# Altium PCB Motor_K.PcbDoc
Units mil, origin at the board's own origin, x right, y up, seen from the top; angles counter-clockwise.
Board outline 870 x 1190 mil, 2 copper layers (Top Layer, Bottom Layer); 15 components, 15 nets, 50 pads, 31 vias.
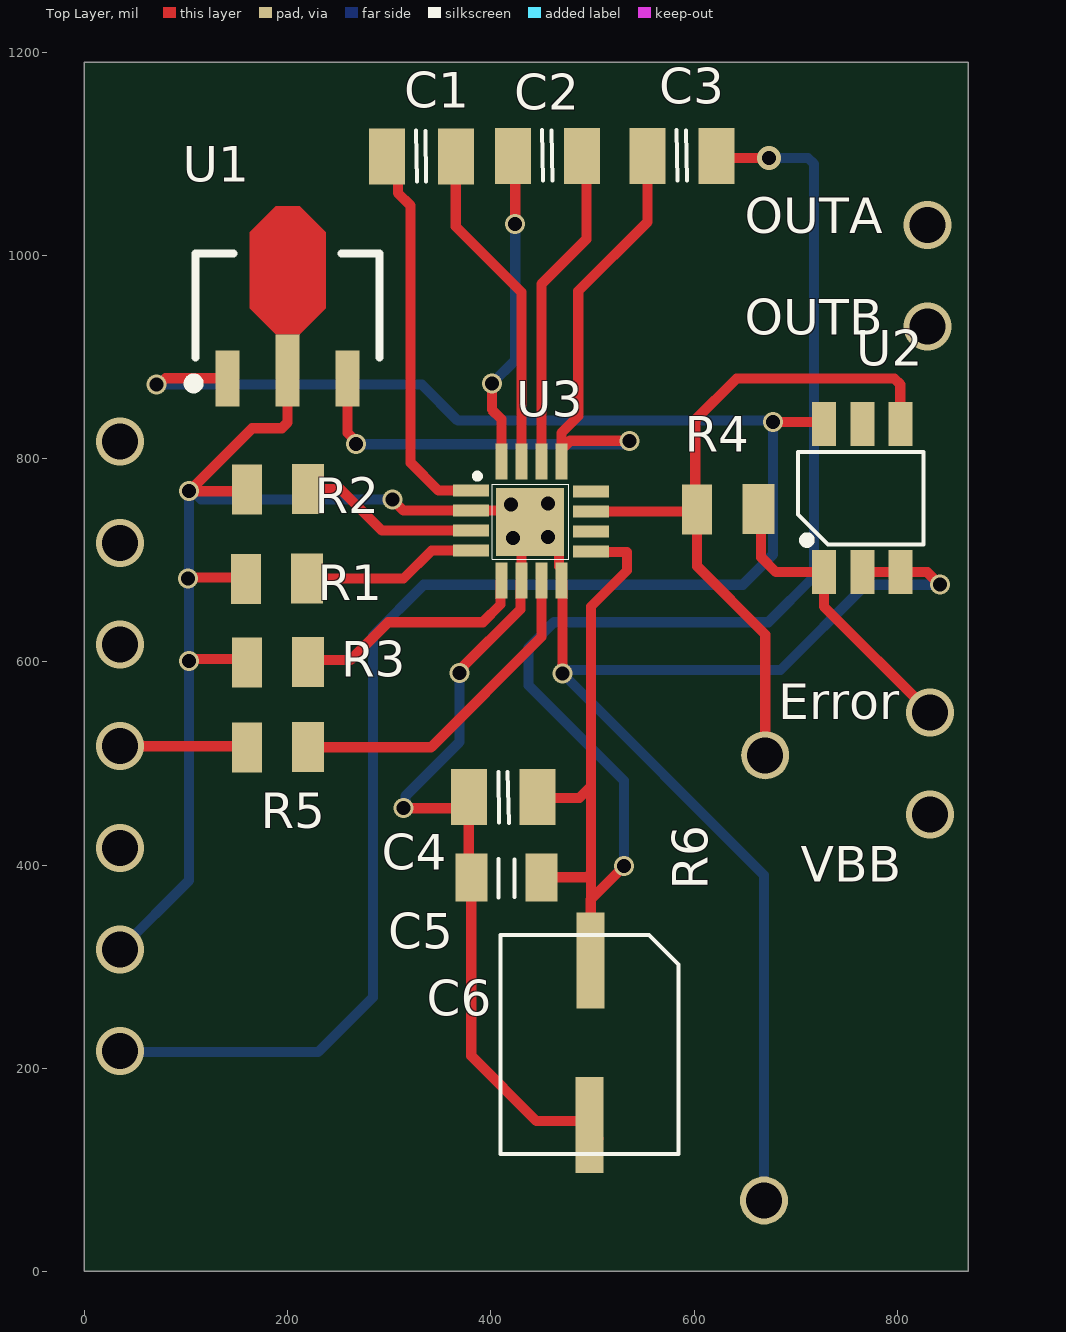
[diagram p0: Top Layer view]
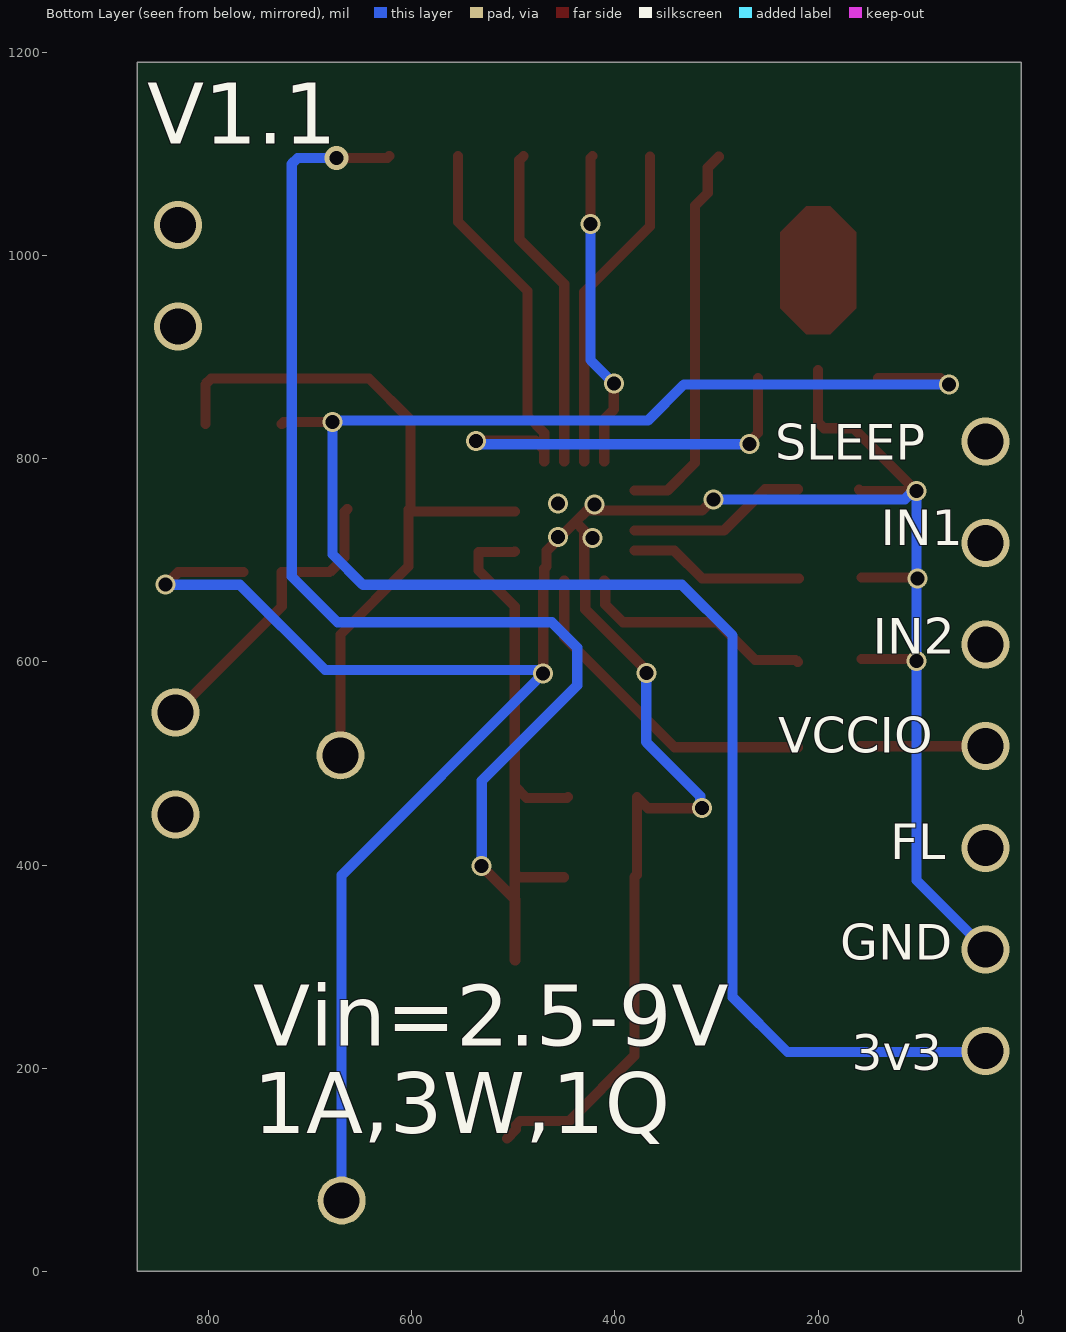
[diagram p1: Bottom Layer view, seen from below]
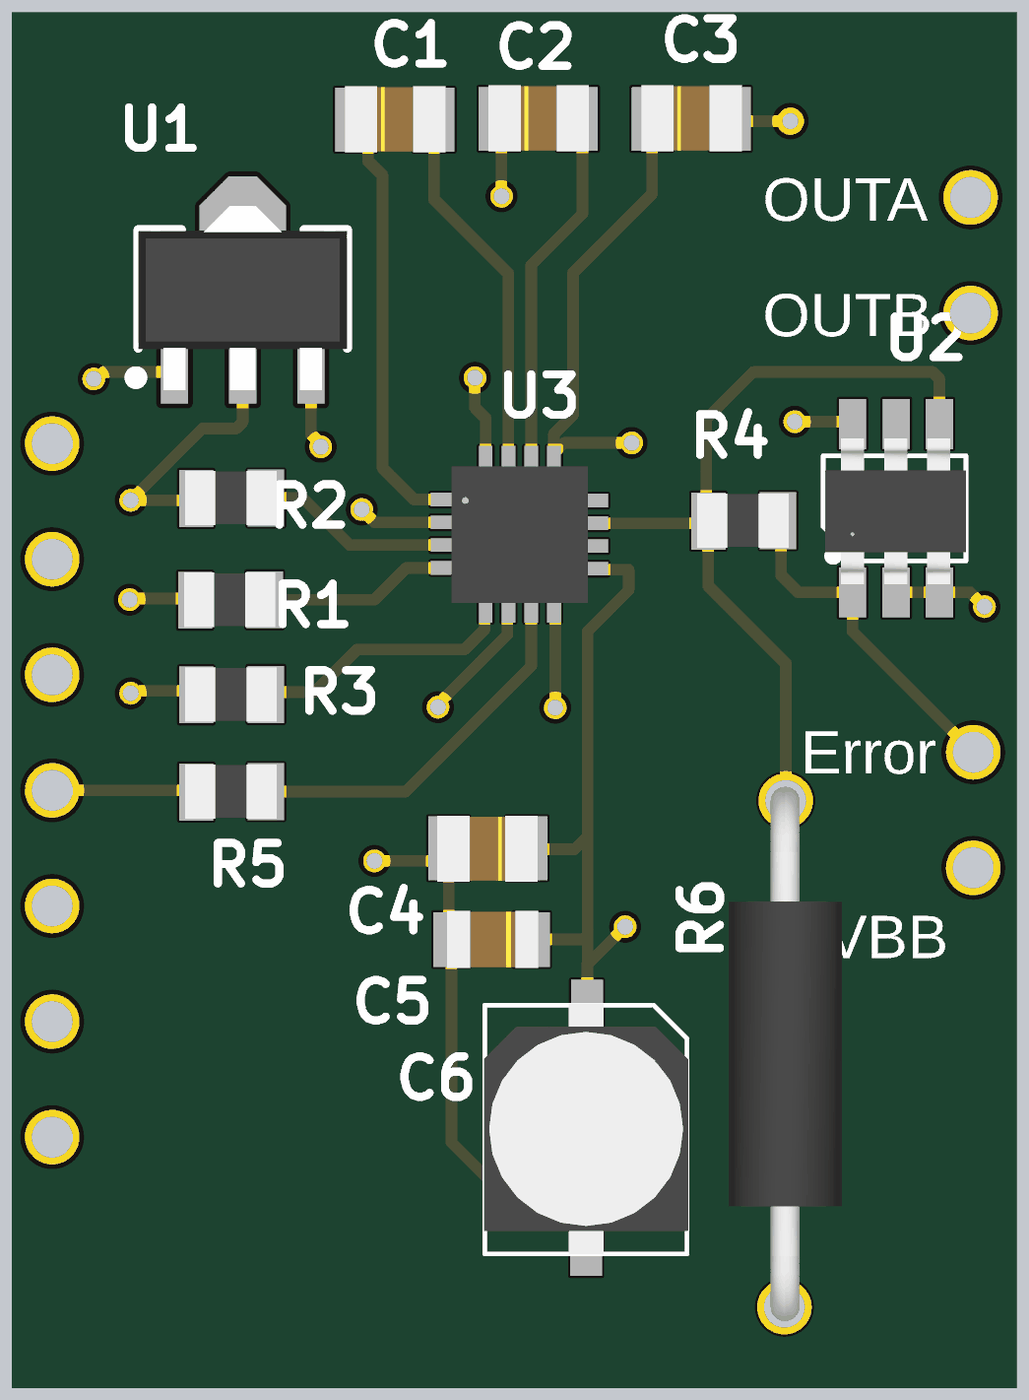
[diagram p2: 3D render of the assembled board from above, using the file's embedded part models]

## Layer stack, top to bottom
Top Solder: solder mask 0.4, Solder Resist, Dk 3.5
Top Layer: signal copper 1.4
Dielectric 1: dielectric 12.6, FR-4, Dk 4.8
Bottom Layer: signal copper 1.4
Bottom Solder: solder mask 0.4, Solder Resist, Dk 3.5

## Board outline
0,0 870,0 870,1190 0,1190

## Design rules (kind name [scope] priority, off if disabled: settings)
Clearance [All] p1: gap=5 ignorepadtopadclearanceinfootprint=FALSE except(0: Arc-Hole Track-Hole SMDPad-Hole THPad-Hole Via-Hole Fill-Hole Poly-Hole Region-Hole Text-Hole)
PolygonConnect [All] p1: connectstyle=Relief reliefconductorwidth=10 reliefentries=4 polygonreliefangle="90 Angle" airgapwidth=10
RoutingVias [All] p1: holewidth=28 width=50 viastyle="Through Hole" minholewidth=28 minwidth=50 maxholewidth=28 maxwidth=50
SolderMaskExpansion [All] p1: expansion=4 istentingtop=FALSE
Width [All] p1: maxlimit=10 minlimit=10 preferedwidth=10
30 further rules are at their usual default settings.

## Components (designator, comment, footprint, x,y, rotation, side; value= is the part's Value field where it differs from the comment)
C1 "CAP CER 0.1UF 10V X7R 0805" "CAP CER 0.1UF 10V X7R 0805" 332,1098 r0 top
C2 "CAP CER 0.1UF 10V X7R 0805" "CAP CER 0.1UF 10V X7R 0805" 456.25,1098.79 r0 top
C3 "CAP CER 0.1UF 10V X7R 0805" "CAP CER 0.1UF 10V X7R 0805" 588.54,1098.79 r0 top
C4 "CAP CER 0.1UF 10V X7R 0805" "CAP CER 0.1UF 10V X7R 0805" 411.75,466.21 r180 top
C5 "CAP CER 10UF 10V X5R 0805" "CAP CER 10UF 10V X5R 0805" 416.54,388 r180 top
C6 "CAP ALUM 10UF 20% 10V SMD" "CAP ALUM 10UF 20% 10V SMD" 496.82,224.11 r270 top
R1 "RES 10K OHM 1% 1/8W 0805" "RES 10K OHM 1% 1/8W 0805" 188.68,681.61 r0 top
R2 "RES 10K OHM 1% 1/8W 0805" "RES 10K OHM 1% 1/8W 0805" 189.68,769.61 r0 top
R3 "RES 10K OHM 1% 1/8W 0805" "RES 10K OHM 1% 1/8W 0805" 189.68,599.61 r0 top
R4 "RES 10K OHM 1% 1/8W 0805" "RES 10K OHM 1% 1/8W 0805" 633,750 r0 top
R5 "RES 10K OHM 1% 1/8W 0805" "RES 10K OHM 1% 1/8W 0805" 189.68,515.61 r0 top
R6 "RES 0.1 THT" 111 672,290 r90 top
U1 "Regülatör 3.3v 100mA SOT89 ST" SOT89 200,950 r90 top
U2 "IC Opamp GP 1 Circuit SOT23-6" "IC Opamp GP 1 Circuit SOT23-6" 765.4,761.23 r90 top
U3 "IC Motor Driver 2.5V-9V 16QFN" "IC Motor Driver 2.5V-9V" 439.45,739.06 r0 top

## Footprints (in the part's own frame and the unit in brackets; to place one, negate y for a bottom-side part, rotate by r counter-clockwise, add the part's x,y. Pads: shape width x height; smd on the part's side, far side on the other; paste and mask are expansions set on the pad)
111 [mm]
  round 1.2 hole 0.9 mask+0.05: 1(-5.59,0.08) 2(5.54,0.05)
  body extent -5.89,-1.18 5.85,1.31, height 2.48
"CAP ALUM 10UF 20% 10V SMD" [mm]
  rect 2.4x0.7 smd mask+0.05: 1(-2.08,0.03) 2(2.03,0.01)
  silkscreen extent -2.72,-2.22 2.75,2.23, body extent -2.76,-2.24 2.76,2.26, height 5.57
"CAP CER 0.1UF 10V X7R 0805" [mm]
  rect 0.9x1.4 smd mask+0.05: 1(-0.87,-0.02) 2(0.85,-0.02)
  silkscreen extent -0.15,-0.64 0.11,0.63, body extent -1.1,-0.73 1.11,0.71, height 1.45
"CAP CER 10UF 10V X5R 0805" [mm]
  rect 0.8x1.2 smd mask+0.05: 1(-0.85,0) 2(0.91,0)
  silkscreen extent -0.17,-0.46 0.24,0.51, body extent -0.99,-0.62 1.01,0.63, height 1.35
"IC Motor Driver 2.5V-9V" [mm]
  rect 0.9x0.3 smd mask+0.05: 1(-1.5,0.75) 2(-1.5,0.25) 3(-1.5,-0.25) 4(-1.5,-0.75) 9(1.5,-0.77) 10(1.5,-0.27) 11(1.5,0.23) 12(1.5,0.73)
  rect 0.3x0.9 smd mask+0.05: 5(-0.74,-1.5) 6(-0.24,-1.5) 7(0.26,-1.5) 8(0.76,-1.5) 13(0.76,1.48) 14(0.26,1.48) 15(-0.24,1.48) 16(-0.74,1.48)
  rect 1.7x1.7 smd mask+0.05: 17(-0.02,-0.03)
  silkscreen extent -1.35,-0.96 0.94,1.12, body extent -1.49,-1.52 1.51,1.48, height 0.76
"IC Opamp GP 1 Circuit SOT23-6" [mm]
  rect 1.1x0.6 smd mask+0.05: 1(-1.852,0.955) 2(-1.852,-0.005) 3(-1.852,-0.955) 4(1.848,-0.955) 5(1.852,-0.01) 6(1.848,0.955)
  silkscreen extent -1.16,-1.54 1.15,1.6, body extent -1.67,-1.54 1.53,1.56, height 1.45
"RES 10K OHM 1% 1/8W 0805" [mm]
  rect 0.75x1.25 smd mask+0.05: 1(-0.76,0)
  rect 0.8x1.25 smd mask+0.05: 2(0.77,0.01)
  body extent -1,-0.59 1,0.61, height 0.71
SOT89 [mm] "SOT89, 3-Leads, Body 4,50x2,45mm, Pitch 1,50mm, Lead Span 4,1mm, IPC Medium Density"
  rect 1.4x0.6 smd: 1(-1.8,1.5) 3(-1.8,-1.5)
  rect 1.8x0.6 smd: 2(-1.6,0)
  Top Layer region: -0.7,0.3 -0.05,0.95 1.85,0.95 2.5,0.3 2.5,-0.3 1.85,-0.95 -0.05,-0.95 -0.7,-0.3
  silkscreen extent -2.05,-2.3 1.32,2.47, body extent -2.2,-2.3 1.85,2.3, height 1.6

## Part data
C1 C2 C3 C4: library part 885012207016, "Cap Ceramic 0.1uF 10V X7R 10% Pad SMD 0805 125C T/R", Dielectric=1511DielectricType, Manufacturer="Wurth Electronics", Supplier Part Number 1=732-8026-1-ND, Voltage Rating (DC)=10V, Insulation Resistance=5GR, Category="Ceramic Capacitors", ComponentLink1Description=http://www.farnell.com/datasheets/2031857.pdf?src-supplier=Farnell, ComponentLink1URL=http://www.farnell.com/datasheets/2031857.pdf?src-supplier=Farnell, ComponentLink2Description=https://katalog.we-online.de/pbs/datasheet/885012207016.pdf?src-supplier=Digikey, ComponentLink2URL=https://katalog.we-online.de/pbs/datasheet/885012207016.pdf?src-supplier=Digikey, ComponentLink3Description=http://www.farnell.com/datasheets/2031857.pdf?src-supplier=Newark, ComponentLink3URL=http://www.farnell.com/datasheets/2031857.pdf?src-supplier=Newark, Designed by=ILKNUR, Height=800um, Manufacturer Part Number=885012207016, Material=4241ConductorMaterial, Pricing 1="1=0,1, 10=0,047, 100=0,042, 500=0,037 (USD)", RoHS=Yes, Stock 1=16017, Supplier 1=Digikey
C5: library part CL21A106KPCLQNC, "Multilayer Ceramic Capacitor, 10 uF, 10 V, ± 10%, X5R, 0805 [2012 Metric]", Manufacturer=Samsung, Supplier Part Number 1=1276-2402-1-ND, Voltage Rating (DC)=10V, Category="Ceramic Capacitors", ComponentLink1Description=https://datasheet.ciiva.com/25730/cl21a106kpclqnc-25730594.pdf?src-supplier=Digikey, ComponentLink1URL=https://datasheet.ciiva.com/25730/cl21a106kpclqnc-25730594.pdf?src-supplier=Digikey, Designed by=ILKNUR, Manufacturer Part Number=CL21A106KPCLQNC, Material=4241ConductorMaterial, Pricing 1="1=0,11, 10=0,077, 50=0,0462, 100=0,0364, 500=0,0269, 1000=0,02226 (USD)", RoHS=Yes, Stock 1=737540, Supplier 1=Digikey
C6: library part EEE-1AA100NR, "Aluminum Electrolytic Capacitor, 10 uF, 10 V, ± 20%, 2000 hours @ 85°C, Radial Can - SMD", Manufacturer=Panasonic, Supplier Part Number 1=PCE4288CT-ND, Category="Aluminum Electrolytic Capacitors", ComponentLink1Description=https://datasheet.ciiva.com/14609/70255710-14609349.pdf?src-supplier=Allied+Electronics, ComponentLink1URL=https://datasheet.ciiva.com/14609/70255710-14609349.pdf?src-supplier=Allied+Electronics, ComponentLink2Description=https://datasheet.ciiva.com/24071/aba0000ce2-40801-24071897.pdf?src-supplier=Mouser, ComponentLink2URL=https://datasheet.ciiva.com/24071/aba0000ce2-40801-24071897.pdf?src-supplier=Mouser, ComponentLink3Description=https://datasheet.ciiva.com/11681/aba0000ce2-11681130.pdf?src-supplier=Avnet, ComponentLink3URL=https://datasheet.ciiva.com/11681/aba0000ce2-11681130.pdf?src-supplier=Avnet, Designed by=ILKNUR, Lead Free=5697LeadFree, Manufacturer Part Number=EEE-1AA100NR, Pricing 1="1=0,4, 10=0,265, 50=0,195, 100=0,1588, 500=0,12538, 1000=0,10587 (USD)", RoHS=Yes, Stock 1=25171, Supplier 1=Digikey, Width=650um
R1 R2 R3 R4 R5: library part RC0805FR-0710KL, "SMD Chip Resistor, 10 kOhm, ± 1%, 125 mW, 0805 [2012 Metric], Thick Film, General Purpose", Case Code (Metric)=2012, Case Code (Imperial)=0805, Manufacturer=Yageo, Max Operating Temperature=155°C, Max Power Dissipation=125mW, Min Operating Temperature=-55°C, Package Quantity=1, Resistance=10kR, Resistance Tolerance=1%, Resistor Type="Thick Film", Supplier Part Number 1=311-10.0KCRCT-ND, Temperature Coefficient=100ppm/°C, Voltage Rating=150V, Case/Package=0805, Category="Chip SMD Resistors", Construction=Rectangular, Depth=1.25mm, Designed by=ILKNUR, Features="Moisture Resistant", Height=0.024inch, Lead Free="Lead Free", Length=0.079inch, Manufacturer Part Number=RC0805FR-0710KL, Military Standard=Not, Number of Terminations=2, Packaging="Tape and Reel", Power Rating=125mW, Pricing 1="1=0,1, 10=0,027, 50=0,017, 100=0,0142, 500=0,00976, 1000=0,00844 (USD)", Reach SVHC Compliant=Unknown, RoHS=Yes, RoHS Compliant=Yes, Series=RC, Size Code=0805, Stock 1=2341548, Supplier 1=Digikey, Technology="THICK FILM", Termination=SMD/SMT, Tolerance=1%, Voltage Rating (AC)=150V, Width=0.049inch
R6: library part LR1LJR10, "Resistors Metal Film Res 0.1 Ohms Pwr-Rtg 0.5 W Tol 5%Axial LR Neohm Series", Manufacturer="TE Connectivity", Manufacturer Part Number=1622598-1, Supplier Part Number 1=A105964CT-ND, ComponentLink1Description=https://datasheet.ciiva.com/6536/eng-ds-1773241-g-6536220.pdf?src-supplier=Digikey, ComponentLink1URL=https://datasheet.ciiva.com/6536/eng-ds-1773241-g-6536220.pdf?src-supplier=Digikey, Designed by=ILKNUR, Pricing 1="1=0,33, 10=0,238, 25=0,1912, 50=0,142, 100=0,1001, 250=0,0892, 500=0,07644, 1000=0,06409 (USD)", RoHS=Yes, Stock 1=268609, Supplier 1=Digikey
U1: "Linear Voltage Regulator IC Positive Fixed 1 Output 3.3V 100mA SOT-89-3", Manufacturer=STMicroelectronics, Manufacturer Part Number=L78L33ABUTR, Supplier Part Number 1=497-7286-1-ND, Category="Voltage Regulators - Linear", ComponentLink1Description=https://datasheet.ciiva.com/7992/1868798-7992604.pdf?src-supplier=Element14, ComponentLink1URL=https://datasheet.ciiva.com/7992/1868798-7992604.pdf?src-supplier=Element14, ComponentLink2Description=https://datasheet.ciiva.com/4882/cd00000446-4882143.pdf?src-supplier=Mouser, ComponentLink2URL=https://datasheet.ciiva.com/4882/cd00000446-4882143.pdf?src-supplier=Mouser, ComponentLink3Description=https://datasheet.ciiva.com/2041/cd00000446-2041996.pdf?src-supplier=Digikey, ComponentLink3URL=https://datasheet.ciiva.com/2041/cd00000446-2041996.pdf?src-supplier=Digikey, ComponentLink4Description=https://datasheet.ciiva.com/2041/cd00000446-2041997.pdf?src-supplier=Digikey, ComponentLink4URL=https://datasheet.ciiva.com/2041/cd00000446-2041997.pdf?src-supplier=Digikey, ComponentLink5Description=https://datasheet.ciiva.com/2041/cd00000446-2041998.pdf?src-supplier=Digikey, ComponentLink5URL=https://datasheet.ciiva.com/2041/cd00000446-2041998.pdf?src-supplier=Digikey, ComponentLink6Description=https://datasheet.ciiva.com/16443/cd00000446-16443399.pdf?src-supplier=Future+Electronics, ComponentLink6URL=https://datasheet.ciiva.com/16443/cd00000446-16443399.pdf?src-supplier=Future+Electronics, Designed by=ILKNUR, Pricing 1="1=0,4, 10=0,346, 25=0,3232, 100=0,2587, 250=0,24024, 500=0,20326, 1000=0,15707 (USD)", RoHS=Yes, Stock 1=190748, Supplier 1=Digikey
U2: "MCP6043 Series 6 V 14 kHz Rail-to-Rail I/O Operational Amplifier -SOT-23-6", Manufacturer=Microchip, Manufacturer Part Number=MCP6043T-E/CH, Supplier Part Number 1=MCP6043T-E/CHCT-ND, Category="Amplifiers - Op Amps, Buffer, Instrumentation", ComponentLink1Description=https://datasheet.ciiva.com/11706/jp014787-11706955.pdf?src-supplier=Avnet, ComponentLink1URL=https://datasheet.ciiva.com/11706/jp014787-11706955.pdf?src-supplier=Avnet, ComponentLink2Description=https://datasheet.ciiva.com/1804/21669c-1804960.pdf?src-supplier=Digikey, ComponentLink2URL=https://datasheet.ciiva.com/1804/21669c-1804960.pdf?src-supplier=Digikey, ComponentLink3Description=https://datasheet.ciiva.com/16450/filehandler-aspxddocname-en014787-16450540.pdf?src-supplier=Future+Electronics, ComponentLink3URL=https://datasheet.ciiva.com/16450/filehandler-aspxddocname-en014787-16450540.pdf?src-supplier=Future+Electronics, Designed by=ILKNUR, Pricing 1="1=0,78, 25=0,66, 100=0,58 (USD)", RoHS=Yes, Stock 1=12673, Supplier 1=Digikey
U3: "1A Brush DC Motor 2.5V~9V Parallel QFN-16-EP(3x3) Motor Driver ICs ROHS", Case/Package=QFN, Manufacturer="Allegro MicroSystems", Manufacturer Part Number=A3918SESTR-T, Max Operating Temperature=150°C, Max Supply Voltage=9V, Min Operating Temperature=-20°C, Min Supply Voltage=2.5V, Output Current=1A, Package Quantity=1, Supplier Part Number 1=620-1476-1-ND, Category="Interface ICs", ComponentLink1Description=https://datasheet.ciiva.com/6609/a3918-datasheet-6609082.pdf?src-supplier=Digikey, ComponentLink1URL=https://datasheet.ciiva.com/6609/a3918-datasheet-6609082.pdf?src-supplier=Digikey, Designed by=ILKNUR, Mount="Surface Mount", Number of Outputs=1, Number of Pins=16, Packaging="Tape and Reel", Pricing 1="1=1,53, 10=1,371, 25=1,3008, 100=1,0686, 250=0,99888, 500=0,88274 (USD)", RoHS=Yes, RoHS Compliant=Yes, Series=-, Stock 1=21815, Supplier 1=Digikey, Technology=DMOS, Interface=Parallel

## Via types
v1: diameter 19.68, hole 13.78, Top Layer to Bottom Layer, 19 vias
v2: diameter 47.24, hole 35.43, Top Layer to Bottom Layer, 11 vias
v3: diameter 23.62, hole 13.78, Top Layer to Bottom Layer, 1 vias

## Nets (pads, with @x,y where several pads share a name; then routed paths per layer and width w, separated by ;. In a path a pad name is that pad's centre, name@x,y a point inside that pad or via, vN(x,y) a via of type N, cw(c..) or ccw(c..) an arc to the next point about the centre after c; other vN are vias at no path point)
3V3: U1.1 U2.6 | length 1930.3
  Top Layer w10: v1(71,873) 73.62,873 79.75,879.13 U1.1 ; v1(677.8,836) 725.8,836 U2.6
  Bottom Layer w10: v2(35,217) 36,216 230,216 284,270 284,626 334,676 648,676 677.8,705.8 v1(677.8,836) 676.32,837.48 367.52,837.48 332,873 v1(71,873)
+5V: R5.1 | length 125.3
  Top Layer w10: v2(35,517) 158.37,517 R5.1
GND: C4.2 C5.2 C6.2 R1.1 R2.1 R3.1 R6.1 U1.2 U2.2 U2.3 U3.2 U3.6 U3.8 U3.17 | length 3239.6
  Top Layer w10: v1@103,683 R1.1@157,683 ; v1@105,603 R3.1@157,603 ; R2.1 158.16,768 v1(103,768) 165,830 194.14,830 200,835.86 U1.2 ; v1(303,760) 314.1,748.9 U3.2 427.64,748.9 U3.17 ; v1(314,456) 367.28,456 C4.2 378.28,390.43 C5.2 380.71,212.29 445,148 493.4,148 C6.2 497.21,139.78 C6.2@505.99,131 ; v1(369,589) 369,591.69 429.09,651.78 429.09,679.09 U3.6 430,729.21 U3.17 ; v1(470.5,588.5) 470.5,678.87 U3.8 469.37,691.81 467.13,694.06 467.13,709.41 U3.17 ; U2.2 U2.3 829.67,688.33 v1(842,676)
  Bottom Layer w10: v2(35,317) 103,385 v1(103,601) v1@103,682 ; v1(102,682) 103,683 v1(103,768) 106.69,768 114.69,760 v1(303,760) ; v1(314,456) 315.85,457.85 315.85,467.85 369,521 v1(369,589) ; R6.1 668.85,390.15 v1(470.5,588.5) 474,592 685,592 769,676 v1(842,676)
  other v1: 422,722 456,723 420,755 456,756
NetC1_1: C1.1 U3.1 | length 381.6
  Top Layer w10: C1.1 308.51,1086.45 308.51,1061.49 321,1049 321,796 348.42,768.58 U3.1
NetC1_2: C1.2 U3.15 | length 326.6
  Top Layer w10: C1.2 365.46,1028.54 430,964 U3.15
NetC2_1: C2.1 U3.16 | length 314.9
  Top Layer w10: v1(401,874) 401,848.31 410.32,839 U3.16 ; C2.1 424,1096 v1(424,1031)
  Bottom Layer w10: v1(401,874) 424,897 v1(424,1031)
NetC2_2: C2.2 U3.14 | length 320.8
  Top Layer w10: U3.14 449.68,971.68 494,1016 494,1093.72 C2.2
NetC3_1: C3.1 U1.3 U3.13 | length 757.2
  Top Layer w10: U1.3 259.06,825.3 267.46,816.89 v1(267.46,814.27) ; v1(536.64,817.64) 478.18,817.64 469.37,808.83 U3.13 469.37,825.37 486,842 486,965 554.28,1033.28 C3.1
  Bottom Layer w10: v1(267.46,814.27) 533.27,814.27 v1(536.64,817.64)
NetC3_2: C3.2 C4.1 C5.1 C6.1 U3.9 | length 1736.6
  Top Layer w10: C4.1 447,466 487,466 498.5,477.5 ; C5.1 494.5,388 498.5,392 ; U3.9 499.24,708 534,708 534,690 498.5,654.5 498.5,477.5 ; v1(531,399) 498.5,366.5 ; C3.2 624,1096 v3(674,1096) ; 498.5,366.5 498.5,392 ; 498.5,366.5 498.5,306.5 C6.1 498,366 498.5,366.5 ; 498.5,392 498.5,477.5
  Bottom Layer w10: v1(531,399) 531,483 437,577 437,614 462,639 673,639 718,684 718,1090.14 712.14,1096 v3(674,1096)
NetR1_2: R1.2 U3.4 | length 172.8
  Top Layer w10: R1.2 314,682 341.53,709.53 U3.4
NetR2_2: R2.2 U3.3 | length 177.3
  Top Layer w10: R2.2 252,770 292.79,729.21 U3.3
NetR3_2: R3.2 U3.5 | length 236.7
  Top Layer w10: R3.2 222,602 262,602 299,639 392,639 409.41,656.41 409.41,679.09 U3.5
NetR4_1: R4.1 R6.2 U2.4 U3.11 | length 722.7
  Top Layer w10: U3.11 601.19,748.11 601.19,838.19 642,879 797.14,879 803,873.14 U2.4 ; R4.1 603,749.92 603,694 670.03,626.97 R6.2
NetR4_2: R4.2 U2.1 | length 298
  Top Layer w10: R4.2 666,747.71 666,703 680.67,688.33 U2.1 727.8,654.55 v2(832.36,550)
NetR5_2: R5.2 U3.7 | length 330.1
  Top Layer w10: R5.2 341.2,516 449.68,624.48 U3.7
pads on no net: U2.5 U3.10 U3.12
copper on no net:
  other v2: 35,417 832.36,450 35,617 35,717 35,817 830,930 830,1030

## Polygon pours and split planes (outlines as drawn)
no net on Top Layer "NONET_L01_P003" (solid, pour order 3): 110,526

## Other copper
Top Layer:
  region: 922,655
Bottom Layer:
  region: 265,1162

## Silkscreen, mask and mechanical layers (free items; w line width, h text height)
Top Overlay:
  text "OUTA" at 650,1010 h60
  text "OUTB" at 650,910 h60
  text "Error" at 682.94,531.61 h60
  text "VBB" at 705,372 h60
Bottom Overlay:
  text "V1.1" at 860,1110 h60
  text "SLEEP" at 242,787 h60
  text "IN1" at 138,703 h60
  text "IN2" at 146,596 h60
  text "VCCIO" at 238.94,498.67 h60
  text "FL" at 129,394 h60
  text "GND" at 178,295 h60
  text "Vin=2.5-9V" at 756,222 h60
  text "3v3" at 167,198 h35
  text "1A,3W,1Q" at 756,135.99 h60
Mechanical 1:
  lines w3.94: 0,0 870,0 870,1191 0,1191 0,0